# Altium PCB WCE_Programming.PcbDoc
Units mm, origin at the board's own origin, x right, y up, seen from the top; angles counter-clockwise.
Board outline 60 x 32.5 mm, 2 copper layers (Top Layer, Bottom Layer); 2 components, 5 nets, 12 pads, 5 vias.
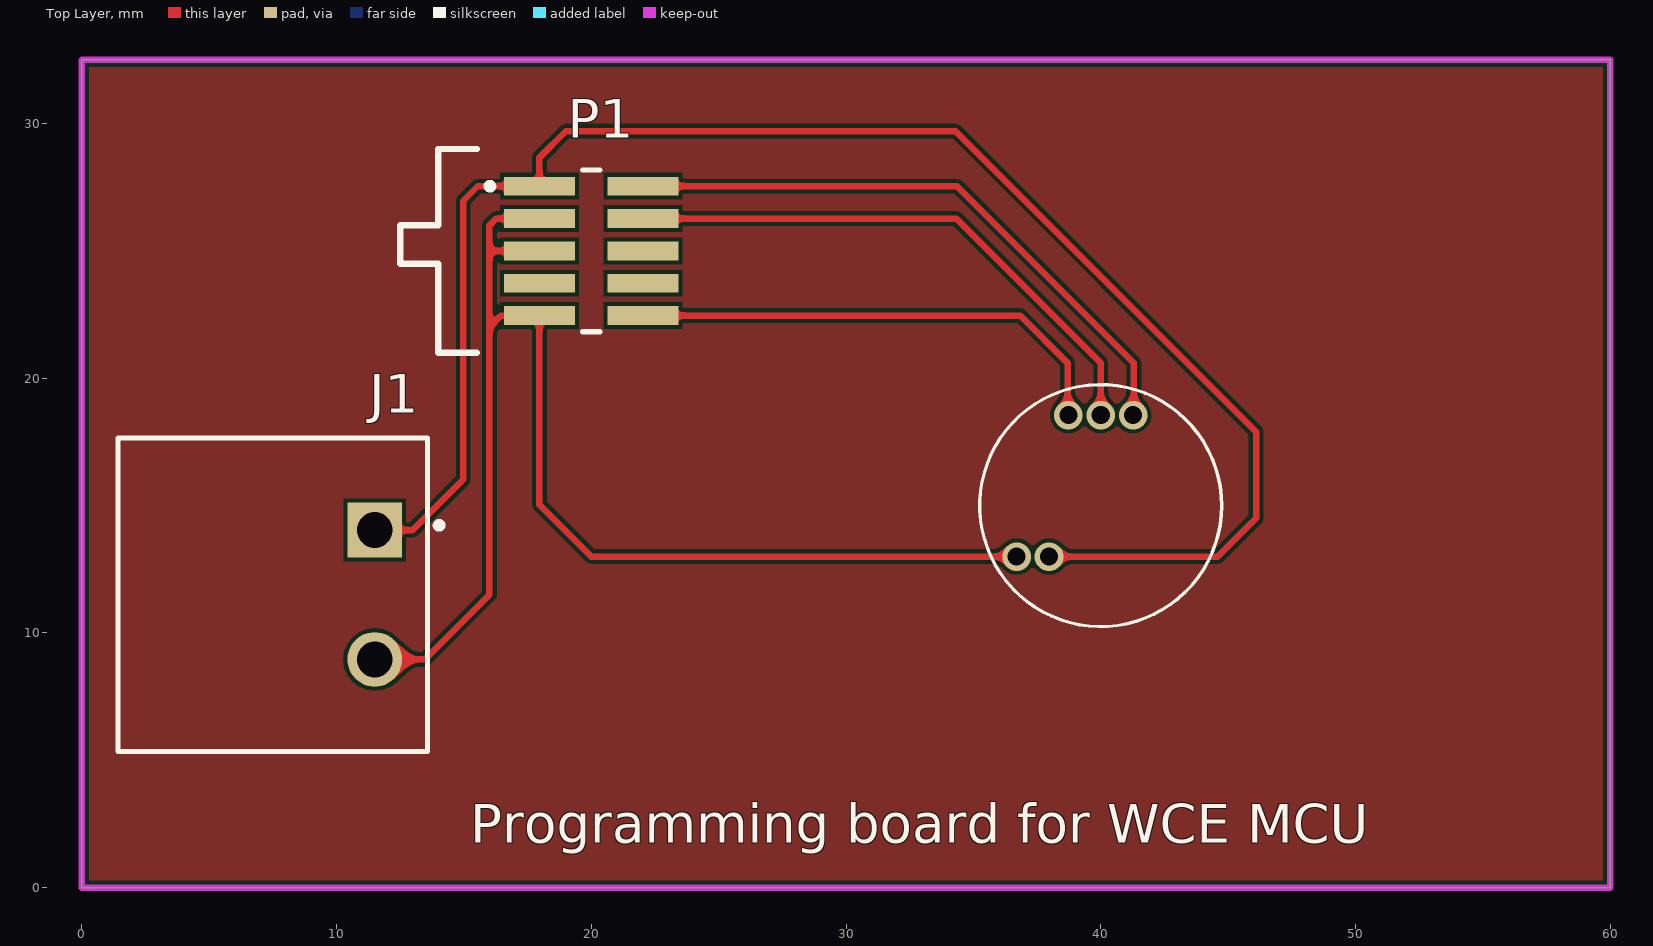
[diagram p0: Top Layer view]
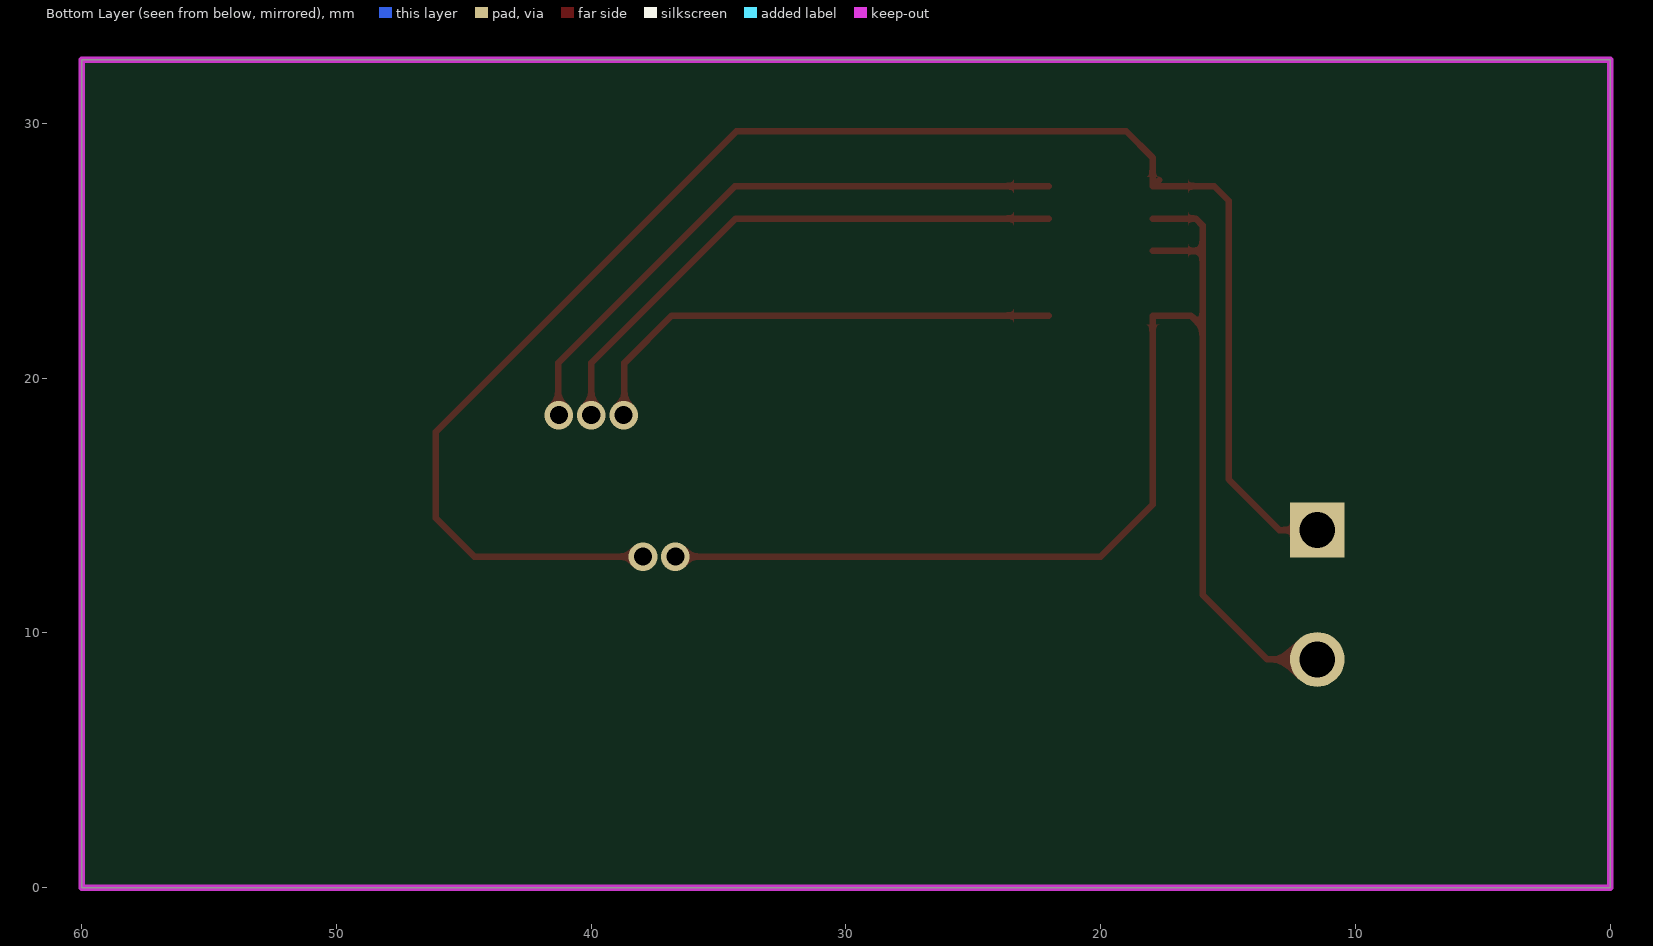
[diagram p1: Bottom Layer view, seen from below]

## Layer stack, top to bottom
Top Solder: solder mask 0.0102, Solder Resist, Dk 3.5
Top Layer: signal copper 0.0356
Dielectric 1: dielectric 0.32, FR-4, Dk 4.8
Bottom Layer: signal copper 0.0356
Bottom Solder: solder mask 0.0102, Solder Resist, Dk 3.5

## Board outline
0,0 0,32.5 60,32.5 60,0

## Design rules (kind name [scope] priority, off if disabled: settings)
Clearance [All] p1: gap=0.15 ignorepadtopadclearanceinfootprint=TRUE
PolygonConnect [All] p1: connectstyle=Relief reliefconductorwidth=0.254 reliefentries=4 polygonreliefangle="90 Angle" airgapwidth=0.254
RoutingVias [All] p1: holewidth=0.71 width=1.12 viastyle="Through Hole" minholewidth=0.71 minwidth=1.12 maxholewidth=0.711 maxwidth=1.27
SolderMaskExpansion [All] p1: expansion=0.102 istentingtop=FALSE
Width [All] p1: maxlimit=0.254 minlimit=0.254 preferedwidth=0.254
30 further rules are at their usual default settings.

## Components (designator, comment, footprint, x,y, rotation, side; value= is the part's Value field where it differs from the comment)
J1 "1757242" FP-1757242-MFG 7.5,11.5 r270 top
P1 "FTSH-105-01-L-DV" SMTC-FTSH-105-01-L-DV_V 20,25 r270 top

## Footprints (in the part's own frame and the unit in brackets; to place one, negate y for a bottom-side part, rotate by r counter-clockwise, add the part's x,y. Pads: shape width x height; smd on the part's side, far side on the other; paste and mask are expansions set on the pad)
FP-1757242-MFG [mm]
  rect 2.15x2.15 hole 1.4 paste-1000 mask+0: 1(-2.54,4)
  round 2.15 hole 1.4 paste-1000 mask+0: 2(2.54,4)
  silkscreen extent -6.15,-6.07 6.15,6.65, body extent -6.25,-6.17 6.25,6.17, height 0.25
SMTC-FTSH-105-01-L-DV_V [mm] "CONN, 10-Leads, Body 6.35x3.43mm, Pitch 1.27mm"
  rect 0.74x2.79 smd: 1(-2.54,-2.035) 2(-2.54,2.035) 3(-1.27,-2.035) 4(-1.27,2.035) 5(0,-2.035) 6(0,2.035) 7(1.27,-2.035) 8(1.27,2.035) 9(2.54,-2.035) 10(2.54,2.035)
  silkscreen extent -3.17,-4.1 3.17,0.34, body extent -3.17,-2.92 3.18,2.92, height 5.96

## Part data
J1: library part CMP-09399-000010-1, "TERM BLOCK HDR 2POS 90DEG 5.08MM", Color=Grey, Current=15A, Current Rating=12A, Flammability Rating="UL94 V-0", Housing Color=Green, Package Quantity=50, Voltage=300V, Voltage Rating=250V, Voltage Rating (DC)=320V, Approvals=UL, Connector Type=Plug, Contact Material=Tin, Contact Plating=Tin, Depth=12mm, Gender=Male, Height=12.08mm, Housing Material=PBT, Lead Free="Lead Free", Length=12.16mm, Max Current Rating=12A, Mount="Through Hole", Number of Contacts=2, Number of Levels=1, Number of Poles=2, Number of Positions=2, Number of Positions Per Level=2, Number of Rows=1, Orientation="Right Angle", Packaging=Bulk, Pitch=5.08mm, REACH SVHC="No SVHC", RoHS Compliant=Yes, Series=MSTBA, Termination=Solder, Weight=5.396916oz, Width=12.1mm
P1: library part CMP-2000-05354-1, "Male Header, Pitch 1.27 mm, 2 x 5 Position, Height 5.96 mm, -55 to 125 degC, RoHS, Bulk", Color=Black, Manufacturer=Samtec, Standard Package=1, Catalog Drawings=FTSHSeriesFTSHSeriesSMTSide, Category=Connectors,Interconnects, Connector Type=Header,Unshrouded, Contact Finish=Gold, Contact Finish Thickness=10µin(0.25µm), Contact Mating Length="0.120\"(3.05mm)", Contact Type=MalePin, Datasheet URL=https://datasheet.ciiva.com/30493/0900766b80adfe36-30493006.pdf, Datasheet Version=Feb-08, EDA / CAD Models=DownloadfromAcceleratedDesigns, Family=RectangularConnectors-Headers,MalePins, Fastening Type=-, Featured Product=Board-To-BoardInterconnectSystems, Features=-, Manufacturer URL=http://www.samtec.com/, Mating Products="FLE-105-01-G-DV-TR-ND-CONNSKT1.27MM10POSDUALSMDCLP-105-02-G-D-P-TR-ND-CONNRCPT10POSDUAL.05\"SMDSFMC-105-L2-S-D-TR-ND-CONN.05\"SURFACE10POSSMTSFMH-105-02-L-D-TR-ND-CONNRECEPT10POS.50\"SMTFLE-105-01-G-DV-A-ND-CONNSKT1.27MM10POSDUALSMDCLP-105-02-G-D-BE-ND-CONNRCPT10POSDUAL.05\"SMDFLE-105-01-G-DV-A-P-ND-CONNSKT1.27MM10POSDUALSMDSAM1153-05-ND-CONNRCPT10POSDUAL.05\"SMDSAM1155-05-ND-CONNRCPT10POSDUAL.05\"SMDSAM1154-05-ND-CONNRCPT10POSDUAL.05\"SMDSFMH-105-02-L-D-LC-ND-CONNRECEPT10POS.50\"SMTSAM1226-05-ND-CONNRCPT.05\"10POSDUALSMD", Mounting Type=SurfaceMount, Number of Positions=10, Number of Positions Loaded=All, Number of Rows=2, Online Catalog=FTSHSeries, Other Names=SAM1161-05, Packaging=Bulk, Pitch="0.050\"(1.27mm)", Product Training Modules=Board-to-BoardConnectors, Row Spacing="0.050\"(1.27mm)", Series=FTSH, Termination=Solder

## Via types
v1: diameter 1.12, hole 0.71, Top Layer to Bottom Layer, 5 vias

## Nets (pads, with @x,y where several pads share a name; then routed paths per layer and width w, separated by ;. In a path a pad name is that pad's centre, name@x,y a point inside that pad or via, vN(x,y) a via of type N, cw(c..) or ccw(c..) an arc to the next point about the centre after c; other vN are vias at no path point)
GND: J1.2 P1.3 P1.5 P1.9 | length 53.3
  Top Layer w0.254: J1.2 13.46,8.96 16,11.5 16,22 ; P1.5 16,25 ; P1.3 16.27,26.27 16,26 16,25 ; v1(36.7,13) 20,13 17.965,15.035 P1.9 16.46,22.46 16,22 ; 16,22 16,25
NRST: P1.10 | length 19.5
  Top Layer w0.254: P1.10 36.84,22.46 38.7,20.6 38.7,18.58 v1(38.73,18.55)
SWCLK: P1.4 | length 22.4
  Top Layer w0.254: P1.4 34.33,26.27 40,20.6 v1(40,18.55)
SWDIO: P1.2 | length 24.2
  Top Layer w0.254: P1.2 34.36,27.54 41.3,20.6 41.3,18.58 v1(41.27,18.55)
VDD: J1.1 P1.1 | length 65.5
  Top Layer w0.254: J1.1 12.987,14.04 14.973,16.027 14.973,26.973 15.54,27.54 P1.1@17.943,27.54 ; P1.1@17.7,27.783 P1.1@17.943,27.54 ; v1(37.97,13) 44.6,13 46.1,14.5 46.1,17.9 34.3,29.7 19.6,29.7 19,29.7 17.965,28.665 P1.1 P1.1@17.943,27.54
pads on no net: P1.6 P1.7 P1.8

## Polygon pours and split planes (outlines as drawn)
no net on Top Layer "NONET_L01_P000" (solid, pour order 0): 0,0 0,32.5 60,32.5 60,0

## Keep-outs
Keep-Out Layer:
  the board outline again, w0.254

## Silkscreen, mask and mechanical layers (free items; w line width, h text height)
Top Overlay:
  circle w0.127: c40,15 r4.75
  lines w0.254: 15.5,21 14,21 14,24.5 12.5,24.5 12.5,26 14,26 14,29 15.5,29
  text "Programming board for WCE MCU" at 15.254,1.762 h1.52